# Altium PCB JetsonBreakout_SoC_1.0_EY.PcbDoc
Units mil, origin at the board's own origin, x right, y up, seen from the top; angles counter-clockwise.
Board outline 6000 x 4000 mil, 2 copper layers (Top Layer, Bottom Layer); 11 components, 15 nets, 80 pads, 0 vias.
Unrouted connection lines stored in the file: 25.
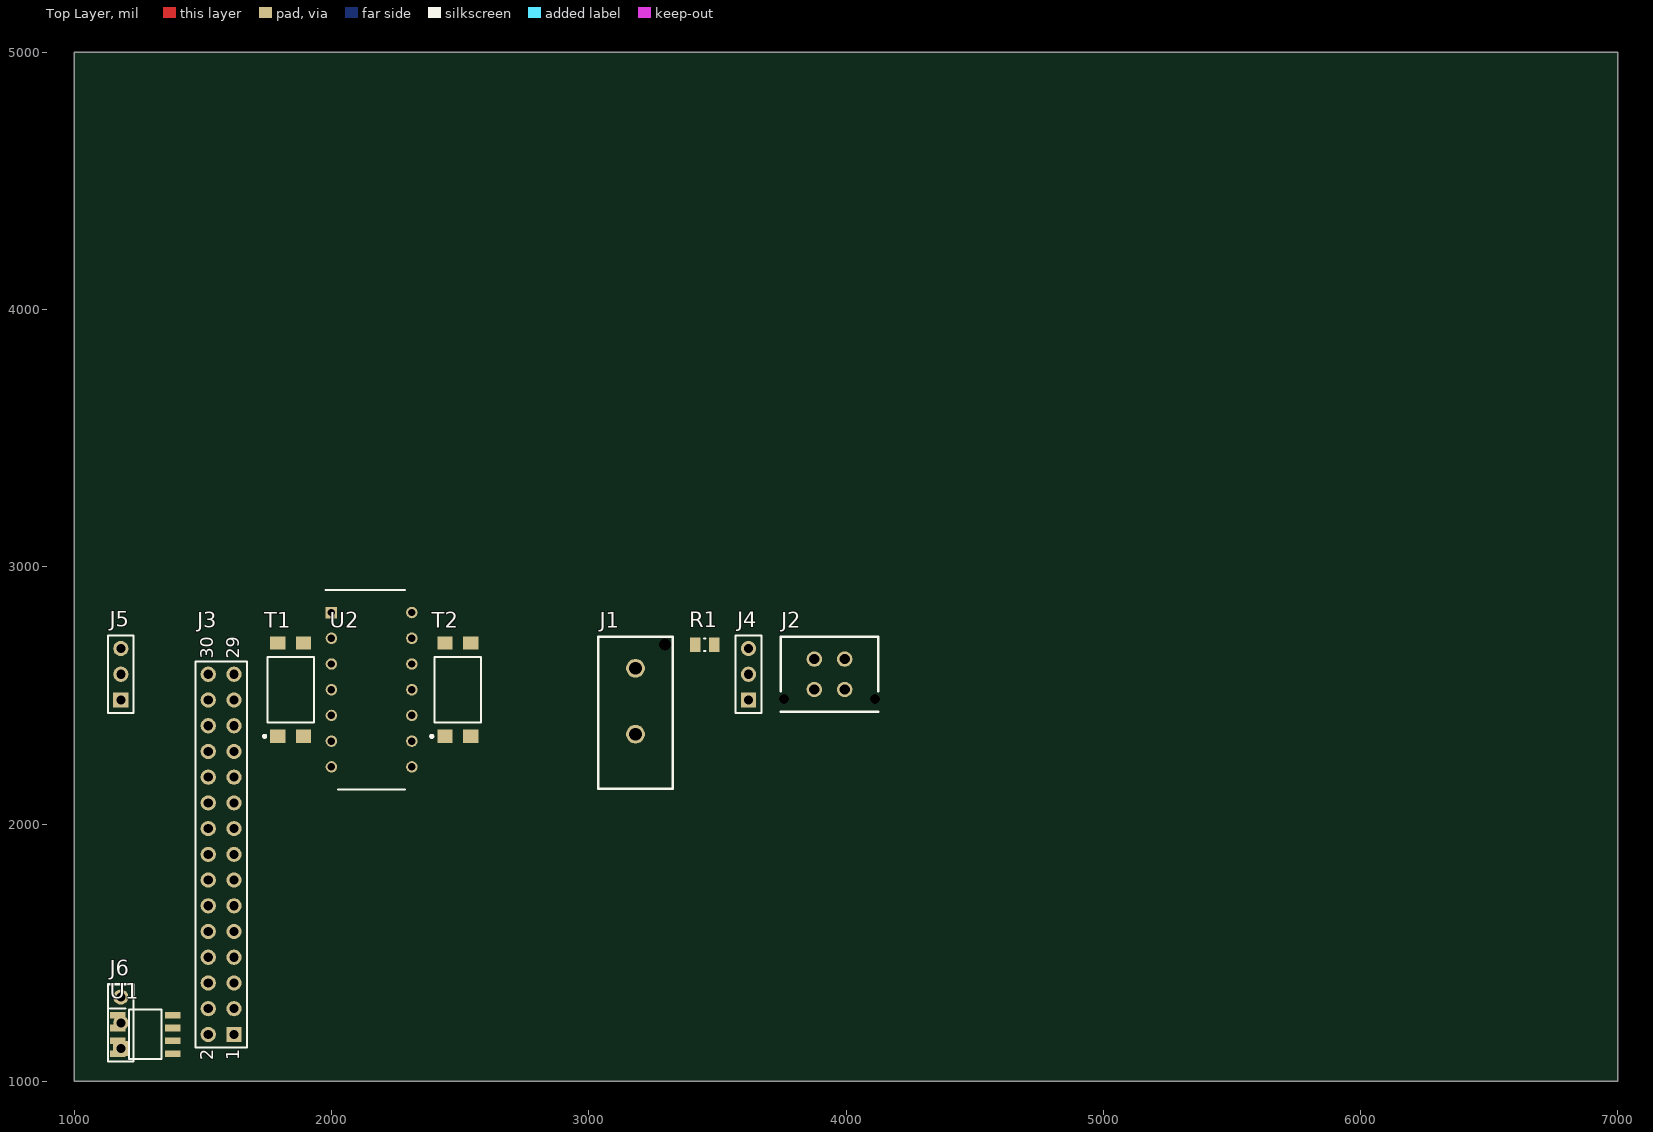
[diagram p0: Top Layer view]
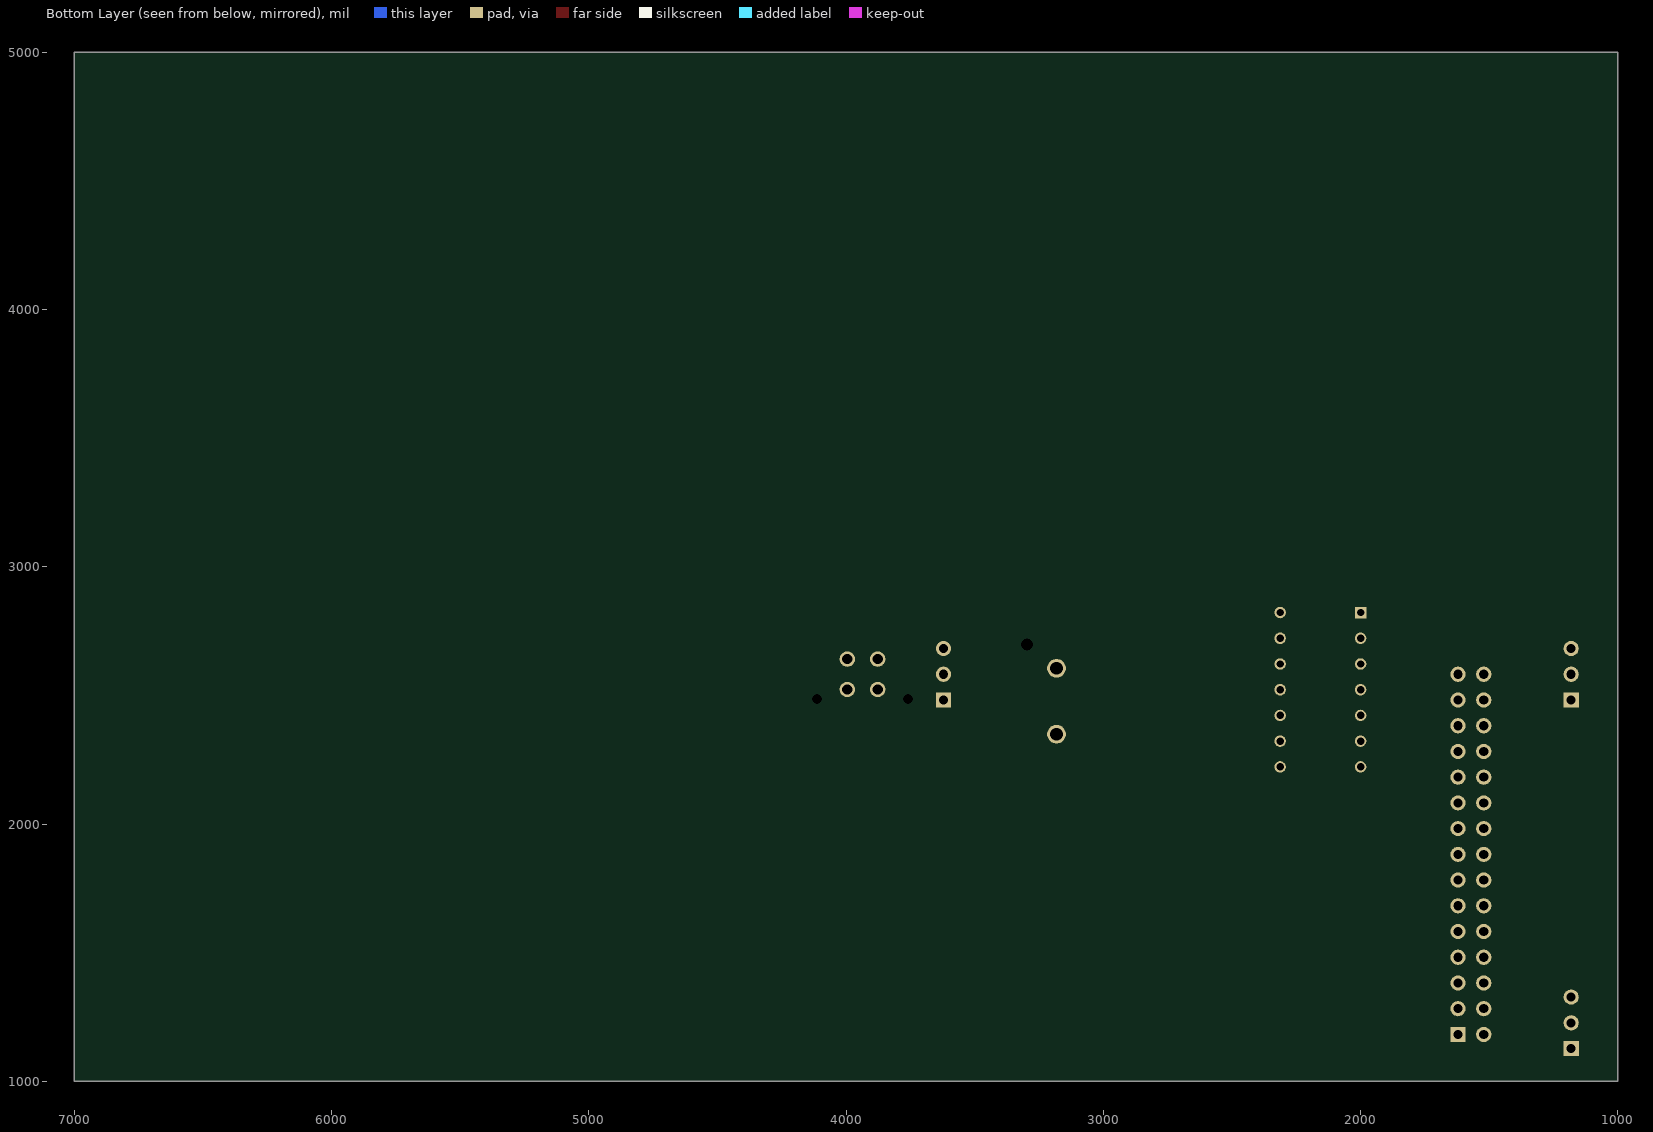
[diagram p1: Bottom Layer view, seen from below]

## Layer stack, top to bottom
Top Solder: solder mask 0.4, Solder Resist, Dk 3.5
Top Layer: signal copper 1.4
Dielectric 1: dielectric 12.6, FR-4, Dk 4.8
Bottom Layer: signal copper 1.4
Bottom Solder: solder mask 0.4, Solder Resist, Dk 3.5

## Board outline
1000,1000 7000,1000 7000,5000 1000,5000

## Design rules (kind name [scope] priority, off if disabled: settings)
Clearance [All] p1: gap=10 ignorepadtopadclearanceinfootprint=FALSE except(0: Arc-Hole Track-Hole SMDPad-Hole THPad-Hole Via-Hole Fill-Hole Poly-Hole Region-Hole Text-Hole)
PolygonConnect [All] p1: connectstyle=Relief reliefconductorwidth=10 reliefentries=4 polygonreliefangle="90 Angle" airgapwidth=10
RoomDefinition JetsonBreakout_SoC_1.0_EY [InComponentClass('JetsonBreakout_SoC_1.0_EY')] p1: confinementstyle=ConfineIn formatcopy=TRUE lockcomponents=FALSE outline 7045,1060 10065,1060 10065,2835 7045,2835
RoutingVias [All] p1: holewidth=28 width=50 viastyle="Through Hole" minholewidth=28 minwidth=50 maxholewidth=28 maxwidth=50
SolderMaskExpansion [All] p1: expansion=4 istentingtop=FALSE
Width [All] p1: maxlimit=10 minlimit=10 preferedwidth=10
30 further rules are at their usual default settings.

## Classes and differential pairs
component class JetsonBreakout_SoC_1.0_EY: J1 J2 J5 J6 R1 T1 T2 U1 U2

## Components (designator, comment, footprint, x,y, rotation, side; value= is the part's Value field where it differs from the comment)
J1 "" 1510482204 3000.87,2117.03 r0 top
J2 "" 0430450427 3935.87,2582.03 r0 top
J3 "" HDR2X15 1620.87,1182.03 r90 top
J4 "" HDR1X3 3620.87,2482.03 r90 top
J5 "" HDR1X3 1180.87,2482.03 r90 top
J6 "" HDR1X3 1180.87,1127.03 r90 top
R1 "" RESC0805(2012)_N 3450.87,2697.03 r0 top value="120.00 Ohm"
T1 "" FAIR-MDIP-4_V 1840.87,2522.03 r90 top
T2 "" FAIR-MDIP-4_V 2490.87,2522.03 r90 top
U1 "" SOIC127P600X175-8N 1275.87,1182.03 r0 top
U2 "SN74LS04NE4" DIP794W53P254L1930H508Q14N 2155.87,2522.03 r0 top

## Footprints (in the part's own frame and the unit in brackets; to place one, negate y for a bottom-side part, rotate by r counter-clockwise, add the part's x,y. Pads: shape width x height; smd on the part's side, far side on the other; paste and mask are expansions set on the pad)
0430450427 [mil] "Molex micro-fit 3.0 4 pos"
  round 60 hole 40: 1(-59.06,59.06) 2(-59.06,-59.06) 3(59.06,59.06) 4(59.06,-59.06)
  round 0 hole 40 unplated: 7(177.17,-96.06) ""(-177.17,-96.06)
  silkscreen extent -190,-145 190,145
1510482204 [mm]
  round 1.85 hole 1.25: 1(4.59,5.898) 2(4.59,12.398)
  round 0 hole 1.2 unplated: 9(7.51,14.748)
  Top Layer region: 5.746,3.673
  silkscreen extent 0.92,0.5 8.26,15.5
DIP794W53P254L1930H508Q14N [mm]
  rect 1.13x1.13 hole 0.73: 1(-3.97,7.62)
  round 1.13 hole 0.73: 2(-3.97,5.08) 3(-3.97,2.54) 4(-3.97,0) 5(-3.97,-2.54) 6(-3.97,-5.08) 7(-3.97,-7.62) 8(3.97,-7.62) 9(3.97,-5.08) 10(3.97,-2.54) 11(3.97,0) 12(3.97,2.54) 13(3.97,5.08) 14(3.97,7.62)
  silkscreen extent -4.53,-9.84 3.3,9.84, body extent -4.1,-9.65 4.1,9.65, height 5.08
FAIR-MDIP-4_V [mm] "SMD, 4-Leads, Body 6.5x4.6mm, Pitch 2.54mm"
  rect 1.3x1.5 smd: 1(-4.6,1.27) 2(-4.6,-1.27) 3(4.6,-1.27) 4(4.6,1.27)
  silkscreen extent -4.72,-2.3 3.25,2.69, body extent -5.08,-2.3 5.08,2.3, height 3.85
HDR1X3 [mm] "Connector; Header; 3 Position"
  rect 1.5x1.5 hole 0.9: 1(0,0)
  round 1.5 hole 0.9: 2(2.54,0) 3(5.08,0)
  silkscreen extent -1.27,-1.27 6.35,1.27
HDR2X15 [mm] "Connector; Header; 15x2 Position"
  rect 1.5x1.5 hole 0.9: 1(0,0)
  round 1.5 hole 0.9: 2(0,2.54) 3(2.54,0) 4(2.54,2.54) 5(5.08,0) 6(5.08,2.54) 7(7.62,0) 8(7.62,2.54) 9(10.16,0) 10(10.16,2.54) 11(12.7,0) 12(12.7,2.54) 13(15.24,0) 14(15.24,2.54) 15(17.78,0) 16(17.78,2.54) 17(20.32,0) 18(20.32,2.54) 19(22.86,0) 20(22.86,2.54) 21(25.4,0) 22(25.4,2.54) 23(27.94,0) 24(27.94,2.54) 25(30.48,0) 26(30.48,2.54) 27(33.02,0) 28(33.02,2.54) 29(35.56,0) 30(35.56,2.54)
  silkscreen extent -1.27,-1.27 36.83,3.81
RESC0805(2012)_N [mm] "Chip Resistor, Body 2.0x1.3mm, IPC Medium Density"
  rect 1.05x1.4 smd: 1(-0.95,0) 2(0.95,0)
  silkscreen extent -0.05,-0.6 0.05,0.6, body extent -1.1,-0.67 1.1,0.68, height 0.7
SOIC127P600X175-8N [mm]
  rect 1.525x0.65 smd: 1(-2.712,1.905) 2(-2.712,0.635) 3(-2.712,-0.635) 4(-2.712,-1.905) 5(2.712,-1.905) 6(2.712,-0.635) 7(2.712,0.635) 8(2.712,1.905)
  silkscreen extent -3.47,-2.45 1.6,2.58, body extent -3,-2.45 3,2.45, height 1.75

## Part data
J1: library part "Molex 6.5MM  power connector"
J2: library part "Molex micro-fit 4-pin (dual row schematic)", "Molex micro-fit 3.0, P/N 0430450427"
J3: library part "Header 15X2", "Header, 15-Pin, Dual row", LatestRevisionDate=17-Jul-2002, LatestRevisionNote="Re-released for DXP Platform.", Publisher="Altium Limited"
J4 J5 J6: library part "Header 3", "Header, 3-Pin", LatestRevisionDate=17-Jul-2002, LatestRevisionNote="Re-released for DXP Platform.", Publisher="Altium Limited"
R1: library part "120R 5% 0805", "120R 0.125W 5% 0805 (2012 Metric)  SMD", Case-EIA=0805, Case-Metric=2012, Power="0.125 W", Tolerance="5 %", Technology=SMT
T1 T2: library part CMP-2000-06281-1, "Phototransistor Optocoupler, 4 us Rise, 3 us Fall, 5000 Vrms, -55 to 110 degC, 4-Pin MDIP, RoHS, Tape and Reel", Current - DC Forward (If) (Max)=50mA, Current Transfer Ratio (Max)=600%@5mA, Current Transfer Ratio (Min)=300%@5mA, Manufacturer="Fairchild Semiconductor", Operating Temperature=-55°C~110°C, Package / Case=4-SMD,GullWing, Package Description="4-Pin Surface Mount Device, Body 6.5 x 4.6 mm, Pitch 2.54 mm", Package Reference="MDIP 4L", Package Version=10/2014, Standard Package=1, Supplier Device Package=4-SMD, Voltage - Forward (Vf) (Typ)=1.2V, Voltage - Isolation=5000Vrms, Voltage - Output (Max)=70V, Category=Isolators, Current - Output / Channel=50mA, Datasheet URL=https://www.fairchildsemi.com/datasheets/FO/FOD817D.pdf, Datasheet Version="Rev. 2.8, 11/2015", Family=Optoisolators-Transistor,PhotovoltaicOutput, Input Type=DC, Manufacturer URL=https://www.fairchildsemi.com/, Mounting Technology=SurfaceMount, Mounting Type=SurfaceMount, Number of Channels=1, Online Catalog=FOD617,814,817Series, Other Names=FOD817DSDDKR, Output Type=Transistor, Package URL=https://www.fairchildsemi.com/package-drawings/N0/N04C.pdf, Packaging=Digi-Reel®, Rise / Fall Time (Typ)=4µs,3µs, Series=-, Turn On / Turn Off Time (Typ)=-, Vce Saturation (Max)=200mV
U1: library part TCAN332DR, "Integrated Circuit", Manufacturer_Name="Texas Instruments", Mouser Part Number=595-TCAN332DR, Datasheet Link=http://www.ti.com/lit/ds/symlink/tcan332.pdf, Height=1.75mm, Manufacturer_Part_Number=TCAN332DR, Mouser Price/Stock=https://www.mouser.com/Search/Refine.aspx?Keyword=595-TCAN332DR
U2: "Integrated Circuit", Manufacturer_Name="Texas Instruments", Mouser Part Number=595-SN74LS04NE4, Datasheet Link=http://www.ti.com/lit/ds/symlink/sn74ls04.pdf, Height=5.08mm, Manufacturer_Part_Number=SN74LS04NE4, Mouser Price/Stock=https://www.mouser.com/Search/Refine.aspx?Keyword=595-SN74LS04NE4

## Nets (pads, with @x,y where several pads share a name; then routed paths per layer and width w, separated by ;. In a path a pad name is that pad's centre, name@x,y a point inside that pad or via, vN(x,y) a via of type N, cw(c..) or ccw(c..) an arc to the next point about the centre after c; other vN are vias at no path point)
GND: J1.2 J3.11 T1.2 T1.3 T2.2 T2.3 U1.2 U2.7
NetJ1_1: J1.1 J3.2 U1.3 U2.14
NetJ2_3: J2.3 J4.3 U1.7
NetJ2_4: J2.4 R1.2 U1.6
NetJ3_5: J3.5 J5.3
NetJ3_7: J3.7 J6.3
NetJ3_15: J3.15 J5.1
NetJ3_17: J3.17 J6.1
NetJ4_2: J4.2 R1.1
NetJ5_2: J5.2 T1.4
NetJ6_2: J6.2 T2.1
NetT1_1: T1.1 U2.2
NetT2_4: T2.4 U2.9
NetU1_1: U1.1 U2.8
NetU1_4: U1.4 U2.1
pads on no net: J1.9 J2. J2.1 J2.2 J2.7 J3.1 J3.3 J3.4 J3.6 J3.8 J3.9 J3.10 J3.12 J3.13 J3.14 J3.16 J3.18 J3.19 J3.20 J3.21 J3.22 J3.23 J3.24 J3.25 J3.26 J3.27 J3.28 J3.29 J3.30 J4.1 U1.5 U1.8 U2.3 U2.4 U2.5 U2.6 U2.10 U2.11 U2.12 U2.13

## Text inside footprints (layer, text, board x,y; h text height)
J3: Top Overlay "1" at 1640.87,1082.03 h50 r90; Top Overlay "2" at 1540.87,1082.03 h50 r90; Top Overlay "29" at 1640.87,2642.03 h50 r90; Top Overlay "30" at 1540.87,2642.03 h50 r90